# Altium PCB PCB1.PcbDoc
Units mm, origin at the board's own origin, x right, y up, seen from the top; angles counter-clockwise.
Board outline 112.39 x 73.91 mm, 2 copper layers (Top Layer, Bottom Layer); 73 components, 57 nets, 231 pads, 22 vias.
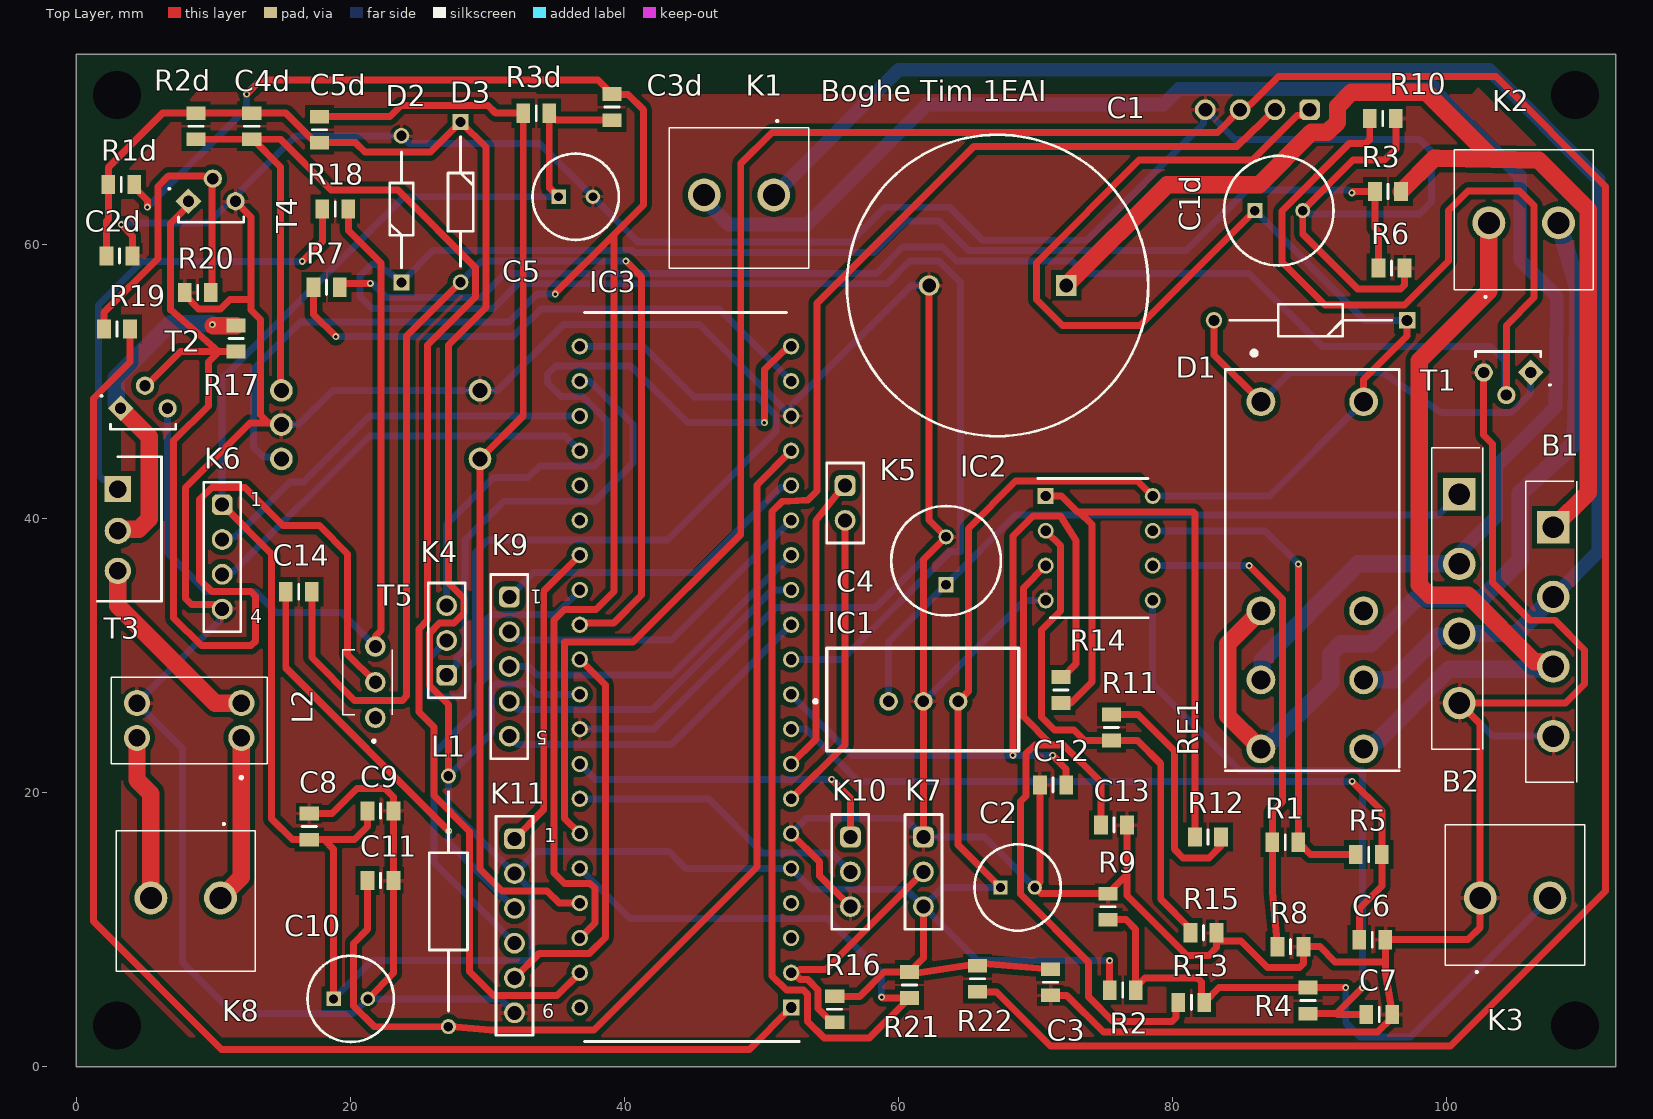
[diagram p0: Top Layer view]
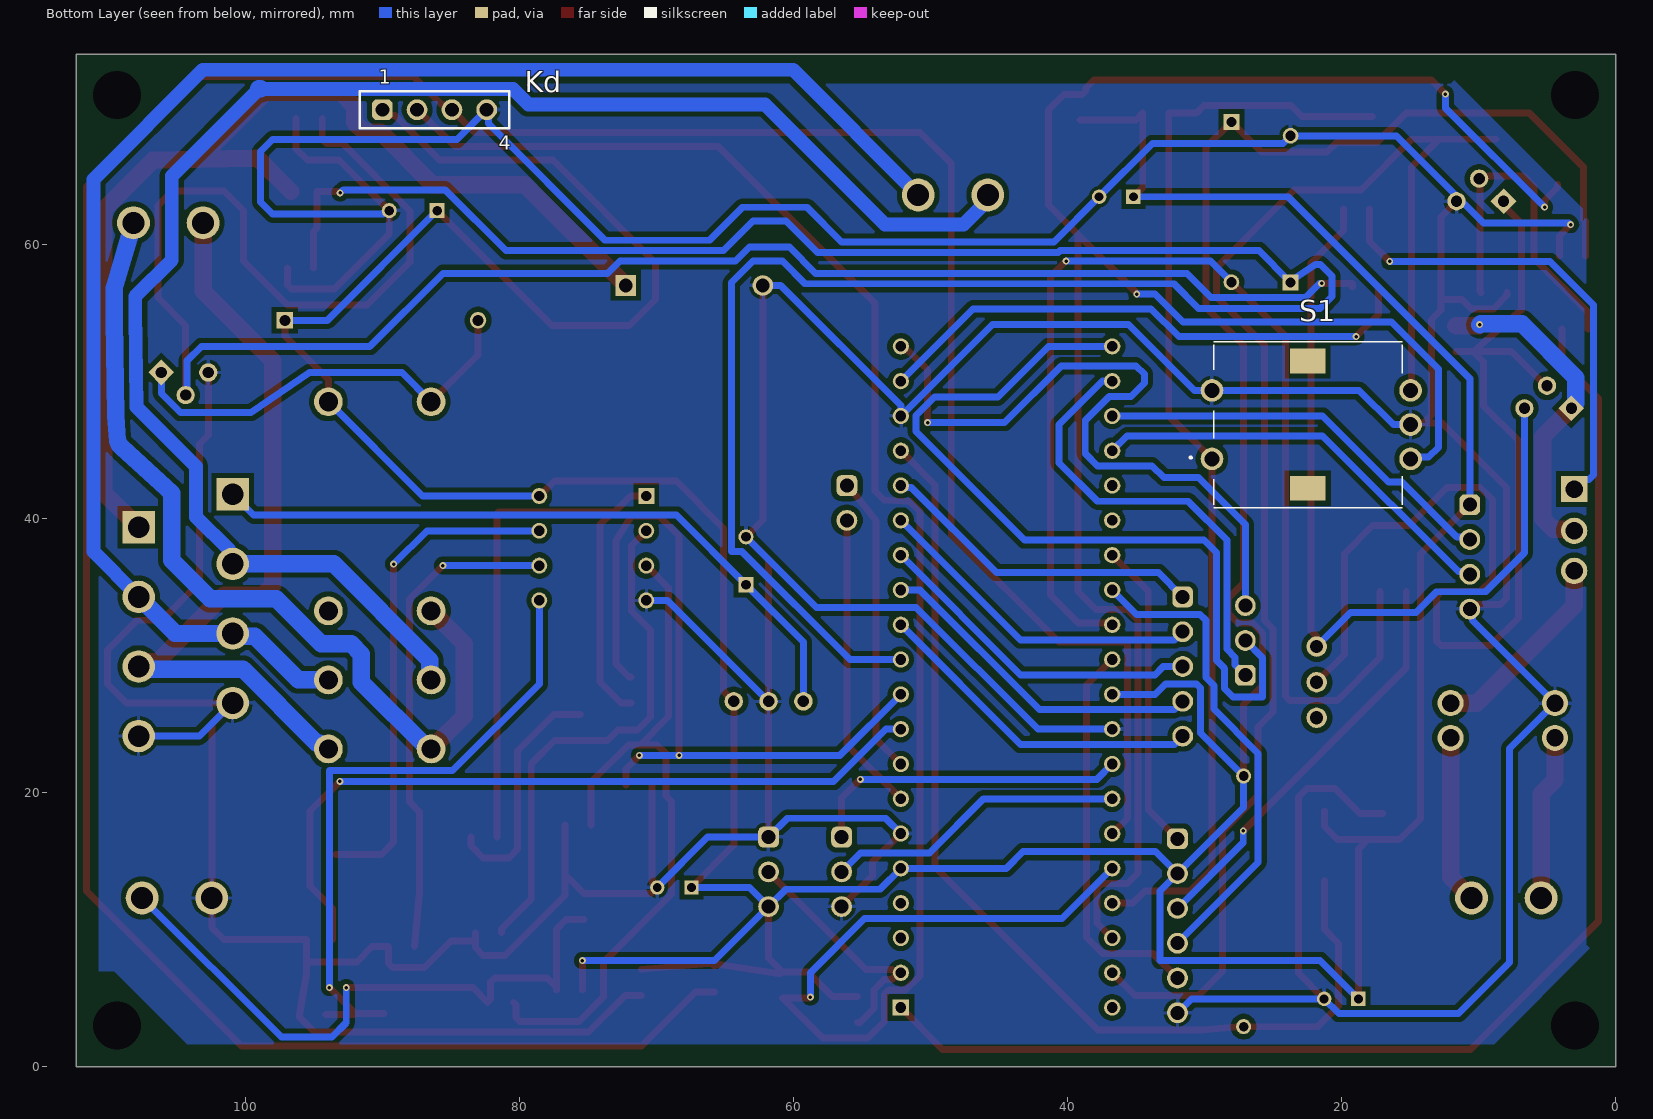
[diagram p1: Bottom Layer view, seen from below]
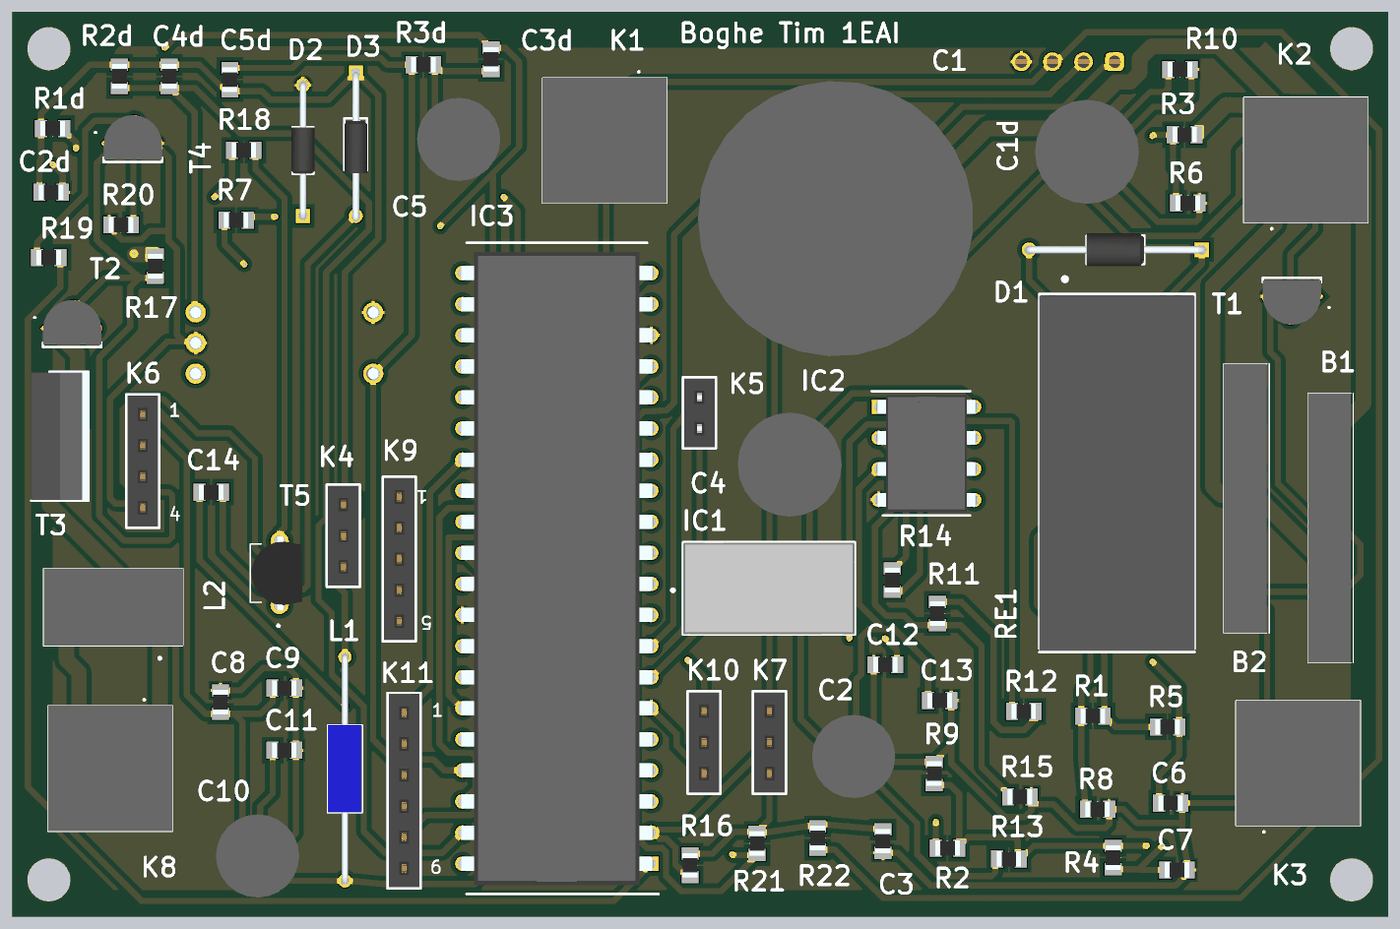
[diagram p2: 3D render of the assembled board from above, using the file's embedded part models]

## Layer stack, top to bottom
Top Solder: solder mask 0.0102, Solder Resist, Dk 3.5
Top Layer: signal copper 0.0356
Dielectric 1: dielectric 0.32, FR-4, Dk 4.8
Bottom Layer: signal copper 0.0356
Bottom Solder: solder mask 0.0102, Solder Resist, Dk 3.5

## Board outline
0,0 112.395,0 112.395,73.914 0,73.914

## Design rules (kind name [scope] priority, off if disabled: settings)
Clearance Clearance_4 [InNamedPolygon('GND_L02_P001')] p1: gap=0.381 ignorepadtopadclearanceinfootprint=FALSE
Clearance Clearance_3 [InNamedPolygon('GND_L01_P000')] p2: gap=0.381 ignorepadtopadclearanceinfootprint=FALSE
Clearance Clearance_2 [InNamedPolygon('GND_L01_P001')] p3: gap=0.508 ignorepadtopadclearanceinfootprint=FALSE
Clearance Clearance_1 [InNamedPolygon('GND_L02_P000')] p4: gap=0.381 ignorepadtopadclearanceinfootprint=FALSE
Clearance [All] p5: gap=0.254 ignorepadtopadclearanceinfootprint=FALSE except(0: Arc-Hole Track-Hole SMDPad-Hole THPad-Hole Via-Hole Fill-Hole Poly-Hole Region-Hole Text-Hole)
HoleSize [All] p1: absolutevalues=TRUE maxlimit=3.556 minlimit=0.254 maxpercent=80.000 minpercent=20.000
PolygonConnect [All] p1: connectstyle=Relief reliefconductorwidth=0.254 reliefentries=4 polygonreliefangle="90 Angle" airgapwidth=0.254
RoutingVias [All] p1: holewidth=0.254 width=0.508 viastyle="Through Hole" minholewidth=0.254 minwidth=0.508 maxholewidth=0.254 maxwidth=0.508
SolderMaskExpansion [All] p1: expansion=0.102 istentingtop=FALSE
Width [All] p1: maxlimit=1.27 minlimit=0.508 preferedwidth=0.508 minimp=50.000000 maximp=50.000000 favimp=50.000000
29 further rules are at their usual default settings.

## Classes and differential pairs
component class Soldeerbout_P5: C1d C2d C3d C4d C5d Kd R1d R2d R3d S1
component class Soldeerbout_P4: C2 C3 C6 C7 C12 C13 IC2 K3 R1 R2 R4 R5 R8 R9 R11 R12 R13 R14 R15
component class Soldeerbout_P3: C8 C9 C10 C11 C14 D3 IC3 K4 K5 K6 K7 K9 K10 K11 L1 R16 R21 R22
component class Soldeerbout_P2: K8 L2 R17 R18 R19 R20 T2 T3 T4 T5
component class Soldeerbout_P1: B1 B2 C1 C4 C5 D1 D2 IC1 K1 K2 R3 R6 R7 R10 RE1 T1

## Components (designator, comment, footprint, x,y, rotation, side; value= is the part's Value field where it differs from the comment)
B1 "GBU6J" "B1,2 GBU6J 600V 6 A" 107.823,39.37 r90 top
B2 "GBU6J" "B1,2 GBU6J 600V 6 A" 100.965,41.783 r90 top
C1 "4700uF" "C 50V 4700UF" 72.263,57.023 r180 top
C1d "100u" CAPPRD350W52D800H1300 86.035,62.484 r0 top
C2 "10u" "C 50V 10µF" 67.477,13.081 r0 top
C2d "100n" 0805 3.175,59.182 r0 top
C3 "100n" 0805 71.12,6.162 r270 top
C3d "10n" 0805 39.116,70.043 r270 top
C4 "100uF" CAPPRD350W52D800H1300 63.5,35.179 r90 top
C4d "10n" 0805 12.827,68.646 r90 top
C5 "10uF" "C 50V 10µF" 35.219,63.5 r0 top
C5d "10n" 0805 17.78,68.392 r270 top
C6 "10n" 0805 94.615,9.271 r0 top
C7 "10n" 0805 95.123,3.81 r0 top
C8 "100n" 0805 17.018,17.526 r90 top
C9 "100n" 0805 22.225,18.669 r0 top
C10 "10uF" "C 50V 10µF" 18.796,4.953 r0 top
C11 "100n" 0805 22.225,13.589 r0 top
C12 "10n" 0805 71.313,20.574 r180 top
C13 "10n" 0805 75.753,17.653 r0 top
C14 "ESR10EZPJ183_1" 0805 16.256,34.671 r180 top
D1 "1N4007" 1N4007 97.155,54.483 r180 top
D2 "1N5231B" "1N5231B 5.1V 0.5W" 23.749,57.245 r90 top
D3 "1N4148" "1N4148, 100V 200MA" 28.067,68.961 r270 top
IC1 "TSR_2-2450" "IC1 TSR-2" 54.809,30.56 r0 top
IC2 "MCP6002-E_P" "IC2 DUAL OPAMP" 74.676,37.846 r0 top
IC3 "ATMEGA4809-PF" IC3 44.482,28.448 r180 top
K1 "" "K PRINTKROONSTEEN 5.08" 50.927,63.627 r180 top
K2 "" "K PRINTKROONSTEEN 5.08" 103.124,61.595 r0 top
K3 "TB007-508-02BE" "K PRINTKROONSTEEN 5.08" 102.489,12.319 r0 top
K4 "61300311821" 61300311821 27.051,31.115 r90 top
K5 "61300211821" 61300211821 56.134,41.148 r270 top
K6 "61300411821" 61300411821 10.668,37.211 r270 top
K7 "61300311821" 61300311821 61.849,14.224 r270 top
K8 "" "K PRINTKROONSTEEN 5.08" 10.541,12.319 r180 top
K9 "61300511821" 61300511821 31.623,29.21 r270 top
K10 "61300311821" 61300311821 56.515,14.224 r270 top
K11 "61300611821" 61300611821 32.004,10.287 r270 top
Kd "61300411821" 61300411821 86.233,69.85 r180 bottom
L1 "10uH 130mA" "L1 10UH 130MA" 27.178,2.921 r90 top
L2 "smoorspoel 10A" "CM SMOORSPOELEN/FILTERS 170OHM 100MHZ 10A" 12.065,24.003 r90 top
R1 "18K" 0805 88.265,16.383 r0 top
R1d "10k" 0805 3.302,64.389 r180 top
R2 "1M" 0805 76.388,5.588 r180 top
R2d "10k" 0805 8.763,68.646 r90 top
R3 "68K" 0805 95.758,63.881 r180 top
R3d "10k" 0805 33.589,69.596 r0 top
R4 "5.6K" 0805 89.916,4.826 r90 top
R5 "5.6K" 0805 94.361,15.494 r0 top
R6 "10K" 0805 96.012,58.293 r0 top
R7 "10K" 0805 18.288,56.896 r180 top
R8 "100e" 0805 88.646,8.763 r0 top
R9 "10M" 0805 75.311,11.684 r90 top
R10 "4.7K" 0805 95.377,69.215 r0 top
R11 "18K" 0805 75.565,24.765 r90 top
R12 "18K" 0805 82.616,16.764 r180 top
R13 "5.6K" 0805 81.407,4.699 r0 top
R14 "5.6K" 0805 71.882,27.498 r90 top
R15 "100e" 0805 82.296,9.779 r0 top
R16 "4.7K" 0805 55.372,4.191 r270 top
R17 "4.7K" 0805 11.684,53.147 r270 top
R18 "100e" 0805 18.923,62.611 r180 top
R19 "10K" 0805 2.987,53.848 r0 top
R20 "4.7K" 0805 8.89,56.515 r180 top
R21 "4.7K" 0805 60.833,5.969 r270 top
R22 "4.7K" 0805 65.786,6.416 r270 top
RE1 "5 VDC 8A" "RELAIS 5V 8A" 90.23,48.534 r270 top
S1 "482016514001" 482016514001 22.486,46.863 r180 bottom
T1 "BC547" "T1,2,4 BC547C 45V 100MA" 105.791,50.546 r180 top
T2 "BC547" "T1,2,4 BC547C 45V 100MA" 3.632,48.184 r0 top
T3 "IRF9Z34NPBF" "T3 P-MOSFET 55V 17A 0.1E" 3.048,41.783 r270 top
T4 "BC547" "T1,2,4 BC547C 45V 100MA" 8.585,63.297 r0 top
T5 "BC557" "BC557C T5 45V 100MA" 21.259,27.167 r90 top

## Footprints (in the part's own frame and the unit in brackets; to place one, negate y for a bottom-side part, rotate by r counter-clockwise, add the part's x,y. Pads: shape width x height; smd on the part's side, far side on the other; paste and mask are expansions set on the pad)
1N4007 [mm]
  rect 1.2x1.2 hole 0.8: 1(0,0)
  round 1.2 hole 0.8: 2(14.1,0)
  silkscreen extent 1.14,-1.18 12.95,1.18, body extent -0.3,-1.35 14.4,1.35, height 2.69
"1N4148, 100V 200MA" [mm]
  rect 1.15x1.15 hole 0.75: 1(0,0)
  round 1.15 hole 0.75: 2(11.7,0)
  silkscreen extent 1.08,-0.93 10.54,0.93, body extent -0.02,-0.92 12.18,0.92, height 1.84
"1N5231B 5.1V 0.5W" [mm]
  rect 1.15x1.15 hole 0.75: 1(0,0)
  round 1.15 hole 0.75: 2(10.7,0)
  silkscreen extent 1.08,-0.86 9.52,0.86, body extent -0.26,-0.95 10.95,0.95, height 1.9
0805 [mm]
  rect 1x1.4 smd: 1(-0.95,0) 2(0.95,0)
  silkscreen extent 0,-0.53 0,0.53, body extent -1,-0.63 1,0.63, height 0.65
61300211821 [mm] "Socket Header, Pitch 2.54 mm, THT, Vertical, single row, 2p"
  rrect50% 1.52x1.52 hole 1.02: 1(-1.27,0)
  round 1.52 hole 1.02: 2(1.27,0)
  silkscreen extent -2.92,-1.35 2.92,1.35, body extent -2.79,-1.25 2.79,1.25, height 8.55
61300311821 [mm] "Socket Header, Pitch 2.54 mm, THT, Vertical, single row, 3p"
  rrect50% 1.52x1.52 hole 1.02: 1(-2.54,0)
  round 1.52 hole 1.02: 2(0,0) 3(2.54,0)
  silkscreen extent -4.19,-1.35 4.19,1.35, body extent -4.06,-1.25 4.06,1.25, height 8.55
61300411821 [mm] "Socket Header, Pitch 2.54 mm, THT, Vertical, single row, 4p"
  rrect50% 1.52x1.52 hole 1.02: 1(-3.81,0)
  round 1.52 hole 1.02: 2(-1.27,0) 3(1.27,0) 4(3.81,0)
  silkscreen extent -5.46,-1.35 5.46,1.35, body extent -5.33,-1.25 5.33,1.25, height 8.55
61300511821 [mm] "Socket Header, Pitch 2.54 mm, THT, Vertical, single row, 5p"
  rrect50% 1.52x1.52 hole 1.02: 1(-5.08,0)
  round 1.52 hole 1.02: 2(-2.54,0) 3(0,0) 4(2.54,0) 5(5.08,0)
  silkscreen extent -6.73,-1.35 6.73,1.35, body extent -6.6,-1.25 6.6,1.25, height 8.55
61300611821 [mm] "Socket Header, Pitch 2.54 mm, THT, Vertical, single row, 6p"
  rrect50% 1.52x1.52 hole 1.02: 1(-6.35,0)
  round 1.52 hole 1.02: 2(-3.81,0) 3(-1.27,0) 4(1.27,0) 5(3.81,0) 6(6.35,0)
  silkscreen extent -8,-1.35 8,1.35, body extent -7.87,-1.25 7.87,1.25, height 8.55
482016514001 [mm]
  round 1.65 hole 1.1: 1(-7,-2.5) 2(-7,2.5) 3(7.5,-2.5) 4(7.5,0) 5(7.5,2.5)
  rect 2.6x1.8 smd: MP1(0,-4.65) MP2(0,4.65)
  silkscreen extent -8.6,-6.05 6.88,6.05, body extent -7.45,-5.85 7.95,5.85, height 27
"B1,2 GBU6J 600V 6 A" [mm]
  rect 2.37x2.37 hole 1.58: 1(0,0)
  round 2.37 hole 1.58: 2(-5.08,0) 3(-10.16,0) 4(-15.24,0)
  silkscreen extent -18.62,-1.7 3.38,2, body extent -18.62,-1.5 3.38,2, height 18.9
"BC557C T5 45V 100MA" [mm]
  round 1.493 hole 0.96: 1(-1.7,-0.585) 2(0.9,-0.585) 3(3.5,-0.585)
  silkscreen extent -3.5,-1.81 3.28,1.81, body extent -2.2,-2.42 3.96,1.71, height 8.67
"C 50V 10µF" [mm]
  rect 1.05x1.05 hole 0.65: 1(0,0)
  round 1.05 hole 0.65: 2(2.5,0)
  silkscreen extent -1.9,-3.15 4.4,3.15, body extent -2.15,-3.4 4.65,3.4, height 8.5
"C 50V 4700UF" [mm]
  rect 1.5x1.5 hole 1: 1(0,0)
  round 1.5 hole 1: 2(10,0)
  silkscreen extent -6,-11 16,11, body extent -6.25,-11.25 16.25,11.25, height 37
CAPPRD350W52D800H1300 [mm]
  rect 1.1x1.1 hole 0.7: 1(0,0)
  round 1.1 hole 0.7: 2(3.5,0)
  silkscreen extent -2.25,-4 5.75,4, body extent -2.5,-4.25 6,4.25, height 13
"CM SMOORSPOELEN/FILTERS 170OHM 100MHZ 10A" [mm]
  round 1.905 hole 1.27: 1(0,0) 2(2.54,0) 3(2.54,7.62) 4(0,7.62)
  silkscreen extent -3,-1.88 4.42,9.5, body extent -1.88,-1.88 4.42,9.5, height 9.6
"IC1 TSR-2" [mm]
  round 1.35 hole 0.85: 1(4.5,-3.89) 2(7.04,-3.89) 3(9.58,-3.89)
  silkscreen extent -0.95,-7.5 14,0, body extent 0.01,-7.5 14.01,0, height 10.33
"IC2 DUAL OPAMP" [mm]
  rect 1.158x1.158 hole 0.758: 1(-3.905,3.81)
  round 1.158 hole 0.758: 2(-3.905,1.27) 3(-3.905,-1.27) 4(-3.905,-3.81) 5(3.905,-3.81) 6(3.905,-1.27) 7(3.905,1.27) 8(3.905,3.81)
  silkscreen extent -4.48,-5.08 3.56,5.08, body extent -4.04,-4.75 4.04,4.75, height 5.33
IC3 [mm]
  rect 1.184x1.184 hole 0.784: 1(-7.715,24.13)
  round 1.184 hole 0.784: 2(-7.715,21.59) 3(-7.715,19.05) 4(-7.715,16.51) 5(-7.715,13.97) 6(-7.715,11.43) 7(-7.715,8.89) 8(-7.715,6.35) 9(-7.715,3.81) 10(-7.715,1.27) 11(-7.715,-1.27) 12(-7.715,-3.81) 13(-7.715,-6.35) 14(-7.715,-8.89) 15(-7.715,-11.43) 16(-7.715,-13.97) 17(-7.715,-16.51) 18(-7.715,-19.05) 19(-7.715,-21.59) 20(-7.715,-24.13) 21(7.715,-24.13) 22(7.715,-21.59) 23(7.715,-19.05) 24(7.715,-16.51) 25(7.715,-13.97) 26(7.715,-11.43) 27(7.715,-8.89) 28(7.715,-6.35) 29(7.715,-3.81) 30(7.715,-1.27) 31(7.715,1.27) 32(7.715,3.81) 33(7.715,6.35) 34(7.715,8.89) 35(7.715,11.43) 36(7.715,13.97) 37(7.715,16.51) 38(7.715,19.05) 39(7.715,21.59) 40(7.715,24.13)
  silkscreen extent -8.31,-26.61 7.37,26.61, body extent -7.86,-25.88 7.86,25.88, height 6.35
"K PRINTKROONSTEEN 5.08" [mm]
  round 2.4 hole 1.6: 1(0,0) 2(5.08,0)
  silkscreen extent -2.54,-5.45 7.62,5.35, body extent -2.54,-4.9 7.62,5.35, height 14.1
"L1 10UH 130MA" [mm]
  round 1.1 hole 0.7: 1(0,0) 2(18.3,0)
  silkscreen extent 1.15,-1.4 17.15,1.4, body extent -0.25,-1.39 18.52,1.39, height 2.78
"RELAIS 5V 8A" [mm]
  round 2.1 hole 1.4: 1(0,-3.75) 2(15.26,-3.75) 3(20.3,-3.75) 4(25.34,-3.75) 5(25.34,3.75) 6(20.3,3.75) 7(15.26,3.75) 8(0,3.75)
  silkscreen extent -3.67,-6.35 26.93,6.35, body extent -2.21,-6.35 26.79,6.35, height 15.86
"T1,2,4 BC547C 45V 100MA" [mil]
  rect 52.48x52.48 hole 32.28 rot 45: 1(-15,-5)
  round 52.48 hole 32.28: 2(55,60) 3(120,-5)
  silkscreen extent -72,-65 144,32, body extent -44,-56 144,86, height 214
"T3 P-MOSFET 55V 17A 0.1E" [mm] "IRF9Z34NPBF"
  rect 1.92x1.92 hole 1.28: 1(-0.381,0)
  round 1.92 hole 1.28: 2(2.667,0) 3(5.588,0)
  silkscreen extent -2.73,-1.5 7.81,3.19, body extent -2.67,-1.5 7.75,3.19, height 18.84

## Part data
B1 B2: "Bridge Rectifier", Manufacturer_Name="GeneSiC Semiconductor", Datasheet Link=https://www.diodemodule.com/silicon_products/bridge_rectifiers/gbu6j.pdf, Height=18.8mm, Manufacturer_Part_Number=GBU6J
C1: library part ESK478M050AQ3AA, "Capacitor Polarised", Manufacturer_Name=Kemet, Mouser2 Part Number=80-ESK478M050AQ3AA, Datasheet Link=https://componentsearchengine.com//ESK478M050AQ3AA.pdf, Height=37mm, Manufacturer_Part_Number=ESK478M050AQ3AA, Mouser2 Price/Stock=https://www.mouser.com/Search/Refine.aspx?Keyword=80-ESK478M050AQ3AA
C1d C4: library part 860020674015, "Capacitor", Manufacturer_Name="Wurth Elektronik", Datasheet Link=https://www.we-online.com/catalog/datasheet/860020674015.pdf, Height=13mm, Manufacturer_Part_Number=860020674015
C2 C5 C10: library part ESS106M050AE2AA, "Capacitor Polarised", Manufacturer_Name=Kemet, Datasheet Link=https://content.kemet.com/datasheets/KEM_A4057_ESS.pdf, Height=8.5mm, Manufacturer_Part_Number=ESS106M050AE2AA
C2d C3 C3d C4d C5d C6 C7 C8 C9 C11 C12 C13: library part ESR10EZPJ183_1, "Resistor", Manufacturer_Name="ROHM Semiconductor", Manufacturer_Part_Number=ESR10EZPJ183, Datasheet Link=https://datasheet.datasheetarchive.com/originals/distributors/Datasheets_SAMA/30ccb516c688c96e56c83a00b77a93f4.pdf, Height=0.65mm
C14: "Resistor", Manufacturer_Name="ROHM Semiconductor", Manufacturer_Part_Number=ESR10EZPJ183, Datasheet Link=https://datasheet.datasheetarchive.com/originals/distributors/Datasheets_SAMA/30ccb516c688c96e56c83a00b77a93f4.pdf, Height=0.65mm
D1: library part RL1N4007-T, "Diode", Manufacturer_Name=Rectron, Datasheet Link=https://www.mouser.in/datasheet/2/345/rl1n4001-rl1n4007-35989.pdf, Manufacturer_Part_Number=RL1N4007-T
D2: "Zener Diode", Manufacturer_Name="ON Semiconductor", Manufacturer_Part_Number=1N5231B
D3: "Diode", Manufacturer_Name=Nexperia, Datasheet Link=https://datasheet.datasheetarchive.com/originals/distributors/Datasheets-112/DSAP0040891.pdf, Manufacturer_Part_Number=1N4148
IC1: "Power Supply", Manufacturer_Name="Traco Power", Manufacturer_Part_Number="TSR 2-2450", Mouser2 Part Number=495-TSR2-2450, Datasheet Link="https://componentsearchengine.com//TSR 2-2450.pdf", Mouser2 Price/Stock=https://www.mouser.com/Search/Refine.aspx?Keyword=495-TSR2-2450
IC2: "Integrated Circuit", Manufacturer_Name=Microchip, Manufacturer_Part_Number=MCP6002-E/P, Mouser2 Part Number=579-MCP6002-E/P, Datasheet Link=https://componentsearchengine.com//MCP6002-E_P.pdf, Height=5.334mm, Mouser2 Price/Stock=https://www.mouser.com/Search/Refine.aspx?Keyword=579-MCP6002-E%2FP
IC3: "Integrated Circuit", Manufacturer_Name=Microchip, Mouser2 Part Number=556-ATMEGA4809-PF, Datasheet Link=https://componentsearchengine.com//ATMEGA4809-PF.pdf, Height=6.35mm, Manufacturer_Part_Number=ATMEGA4809-PF, Mouser2 Price/Stock=https://www.mouser.com/Search/Refine.aspx?Keyword=556-ATMEGA4809-PF
K1 K2 K8: library part TB007-508-02BE, "Connector", Manufacturer_Name="CUI Inc.", Mouser2 Part Number=490-TB007-508-02BE, Datasheet Link=https://componentsearchengine.com//TB007-508-02BE.pdf, Height=14mm, Manufacturer_Part_Number=TB007-508-02BE, Mouser2 Price/Stock=https://www.mouser.com/Search/Refine.aspx?Keyword=490-TB007-508-02BE
K3: "Connector", Manufacturer_Name="CUI Inc.", Mouser2 Part Number=490-TB007-508-02BE, Datasheet Link=https://componentsearchengine.com//TB007-508-02BE.pdf, Height=14mm, Manufacturer_Part_Number=TB007-508-02BE, Mouser2 Price/Stock=https://www.mouser.com/Search/Refine.aspx?Keyword=490-TB007-508-02BE
K4 K7 K10: "WR-PHD Socket Header, THT, pitch 2.54mm, Single Row, Vertical, 3p", Contact Resistance=20mOhm, Manufacturer="Wurth Elektronik", Operating Temperature="-40 to +125degC", Rated Current=3A, Withstanding Voltage=500VAC, Working Voltage=250VAC, ComponentLink1Description=Manufacturer, ComponentLink1URL=http://www.we-online.de, ComponentLink2Description=Datasheet, ComponentLink2URL=https://www.we-online.com/catalog/datasheet/61300311821.pdf, Gender="Socket Header", Manufacturer Part Number=61300311821, Mounting Technology=THT, Orientation=Vertical, Packaging=Tray, Pin Number=3, Pitch=2.54mm, Row Number=Single
K5: "WR-PHD Socket Header, THT, pitch 2.54mm, Single Row, Vertical, 2p", Contact Resistance=20mOhm, Manufacturer="Wurth Elektronik", Operating Temperature="-40 to +125degC", Rated Current=3A, Withstanding Voltage=500VAC, Working Voltage=250VAC, ComponentLink1Description=Manufacturer, ComponentLink1URL=http://www.we-online.de, ComponentLink2Description=Datasheet, ComponentLink2URL=https://www.we-online.com/catalog/datasheet/61300211821.pdf, Gender="Socket Header", Manufacturer Part Number=61300211821, Mounting Technology=THT, Orientation=Vertical, Packaging=Tray, Pin Number=2, Pitch=2.54mm, Row Number=Single
K6 Kd: "WR-PHD Socket Header, THT, pitch 2.54mm, Single Row, Vertical, 4p", Contact Resistance=20mOhm, Manufacturer="Wurth Elektronik", Operating Temperature="-40 to +125degC", Rated Current=3A, Withstanding Voltage=500VAC, Working Voltage=250VAC, ComponentLink1Description=Manufacturer, ComponentLink1URL=http://www.we-online.de, ComponentLink2Description=Datasheet, ComponentLink2URL=https://www.we-online.com/catalog/datasheet/61300411821.pdf, Gender="Socket Header", Manufacturer Part Number=61300411821, Mounting Technology=THT, Orientation=Vertical, Packaging=Tray, Pin Number=4, Pitch=2.54mm, Row Number=Single
K9: "WR-PHD Socket Header, THT, pitch 2.54mm, Single Row, Vertical, 5p", Contact Resistance=20mOhm, Manufacturer="Wurth Elektronik", Operating Temperature="-40 to +125degC", Rated Current=3A, Withstanding Voltage=500VAC, Working Voltage=250VAC, ComponentLink1Description=Manufacturer, ComponentLink1URL=http://www.we-online.de, ComponentLink2Description=Datasheet, ComponentLink2URL=https://www.we-online.com/catalog/datasheet/61300511821.pdf, Gender="Socket Header", Manufacturer Part Number=61300511821, Mounting Technology=THT, Orientation=Vertical, Packaging=Tray, Pin Number=5, Pitch=2.54mm, Row Number=Single
K11: "WR-PHD Socket Header, THT, pitch 2.54mm, Single Row, Vertical, 6p", Contact Resistance=20mOhm, Manufacturer="Wurth Elektronik", Operating Temperature="-40 to +125degC", Rated Current=3A, Withstanding Voltage=500VAC, Working Voltage=250VAC, ComponentLink1Description=Manufacturer, ComponentLink1URL=http://www.we-online.de, ComponentLink2Description=Datasheet, ComponentLink2URL=https://www.we-online.com/catalog/datasheet/61300611821.pdf, Gender="Socket Header", Manufacturer Part Number=61300611821, Mounting Technology=THT, Orientation=Vertical, Packaging=Tray, Pin Number=6, Pitch=2.54mm, Row Number=Single
L1: library part 78F100J-RC, "Inductor", Manufacturer_Name=Bourns, Mouser2 Part Number=542-78F100-RC, Datasheet Link=https://componentsearchengine.com//78F100J-RC.pdf, Manufacturer_Part_Number=78F100J-RC, Mouser2 Price/Stock=https://www.mouser.com/Search/Refine.aspx?Keyword=542-78F100-RC
L2: library part CM2545X171B-10, "Transformer", Manufacturer_Name="Laird Technologies", Datasheet Link=https://datasheet.datasheetarchive.com/originals/dk/DKDS-7/122753.pdf, Height=9.5mm, Manufacturer_Part_Number=CM2545X171B-10
R1 R1d R2 R2d R3 R3d R4 R5 R6 R7 R8 R9 R10 R11 R12 R13 R14 R15 R16 R17 R18 R19 R20 R21 R22: library part ESR10EZPJ183, "Resistor", Manufacturer_Name="ROHM Semiconductor", Datasheet Link=https://datasheet.datasheetarchive.com/originals/distributors/Datasheets_SAMA/30ccb516c688c96e56c83a00b77a93f4.pdf, Height=0.65mm, Manufacturer_Part_Number=ESR10EZPJ183
RE1: library part RT424005, "Relay or Contactor", Manufacturer_Name="TE Connectivity", Mouser2 Part Number=655-RT424005, Datasheet Link=https://componentsearchengine.com//RT424005.pdf, Manufacturer_Part_Number=RT424005, Mouser2 Price/Stock=https://www.mouser.com/Search/Refine.aspx?Keyword=655-RT424005
S1: "Switch", Manufacturer_Name="Wurth Elektronik", Mouser2 Part Number=710-482016514001, Datasheet Link=https://componentsearchengine.com//482016514001.pdf, Height=26.9mm, Manufacturer_Part_Number=482016514001, Mouser2 Price/Stock=https://www.mouser.com/Search/Refine.aspx?Keyword=710-482016514001
T1 T2 T4: library part BC547CBU, "Transistor BJT NPN", Manufacturer_Name="ON Semiconductor", Datasheet Link=https://www.onsemi.com/pdf/datasheet/bc550-d.pdf, Height=5.33mm, Manufacturer_Part_Number=BC547CBU
T3: "MOSFET (P-Channel)", Manufacturer_Name=Infineon, Mouser2 Part Number=942-IRF9Z34NPBF, Datasheet Link=https://componentsearchengine.com//IRF9Z34NPBF.pdf, Height=4.69mm, Manufacturer_Part_Number=IRF9Z34NPBF, Mouser2 Price/Stock=https://www.mouser.com/Search/Refine.aspx?Keyword=942-IRF9Z34NPBF
T5: library part BC557ATA, "Transistor BJT PNP", Manufacturer_Name="ON Semiconductor", Mouser2 Part Number=512-BC557ATA, Datasheet Link=https://componentsearchengine.com//BC557ATA.pdf, Manufacturer_Part_Number=BC557ATA, Mouser2 Price/Stock=https://www.mouser.com/Search/Refine.aspx?Keyword=512-BC557ATA

## Free pads (board coordinates)
  round 1.524 hole 3.5: 1(3,3) 2(3,70.914) 4(109.395,3)
  round 0 hole 3.5: 3(109.395,70.914)

## Via types
v1: diameter 0.508, hole 0.254, Top Layer to Bottom Layer, 22 vias

## Nets (pads, with @x,y where several pads share a name; then routed paths per layer and width w, separated by ;. In a path a pad name is that pad's centre, name@x,y a point inside that pad or via, vN(x,y) a via of type N, cw(c..) or ccw(c..) an arc to the next point about the centre after c; other vN are vias at no path point)
+5: C1d.1 C2.1 C2d.1 C3.1 C3d.2 C4d.2 C5.1 C5d.2 C8.1 C9.1 C10.1 D1.1 D3.1 IC1.3 IC2.8 IC3.5 IC3.31 K6.1 K7.3 K11.2 Kd.1 L1.2 R1d.2 R2.2 R2d.2 R3d.2 R16.1 R21.1 R22.1 RE1.8 | length 438.6
  Top Layer w0.508: C2d.1 2.225,61.722 2.352,61.849 R1d.2 2.352,65.623 6.325,69.596 R2d.2 C4d.2 15.316,69.596 17.47,67.442 C5d.2 20.396,67.442 21.087,66.751 25.857,66.751 D3.1 29.912,67.116 29.912,55.416 27.178,52.682 27.178,35.321 28.319,34.18 28.319,33.13 27.574,32.385 26.528,32.385 25.783,31.64 25.783,27.827 27.178,26.432 L1.2 ; K6.1 14.275,37.414 14.275,18.1 15.799,16.576 C8.1 18.095,16.576 ; C10.1 18.796,15.875 18.095,16.576 ; C9.1 21.275,17.526 20.325,16.576 18.095,16.576 ; C5.1 34.539,64.18 R3d.2 35.042,69.093 C3d.2 ; R16.1 57.201,5.141 58.979,6.919 R21.1 ; K7.3 61.849,7.935 R21.1 ; C2.1 64.389,16.169 IC1.3 65.126,27.407 65.126,39.294 68.58,42.748 77.488,42.748 IC2.8 ; C3.1 70.674,7.152 70.665,7.152 66.2,7.54 65.993,7.54 65.851,7.421 R22.1 65.652,7.465 65.446,7.465 61.179,6.815 60.974,6.815 60.84,6.914 R21.1 ; R2.2 v1(75.438,7.747) ; C1d.1 77.653,54.102 72.009,54.102 70.104,56.007 70.104,58.674 77.597,66.167 85.852,66.167 89.109,69.424 89.617,69.424 Kd.1 ; RE1.8 93.98,50.165 97.155,53.34 D1.1
  Bottom Layer w0.508: K6.1 10.668,50.241 23.927,63.5 C5.1 ; C10.1 21.59,7.747 33.274,7.747 33.274,12.827 K11.2 ; IC3.31 33.653,27.178 32.893,27.938 30.63,27.938 30.328,27.635 30.328,24.371 L1.2 27.178,18.923 K11.2 ; C2.1 63.246,13.081 K7.3 ; v1(75.438,7.747) 65.786,7.747 K7.3 ; IC2.8 87.102,41.656 RE1.8 ; C1d.1 94.036,54.483 D1.1 ; K11.2 33.604,15.697 43.282,15.697 44.501,14.478 IC3.5 53.721,12.954 60.579,12.954 K7.3
GND: B1.4 B2.4 C1.2 C1d.2 C2.2 C2d.2 C3.2 C4.2 C5.2 C6.2 C7.2 C8.2 C9.2 C10.2 C11.2 C12.2 C13.2 D2.2 IC1.2 IC2.4 IC3.6 IC3.18 IC3.32 K3.1 K6.4 K7.1 K10.3 K11.6 Kd.4 L2.3 R6.2 R8.2 R9.2 R10.2 R15.2 R20.2 S1.2 S1.4 T1.3 T4.3 | length 587.3
  Top Layer w0.508: v1(3.302,61.468) 4.125,60.645 C2d.2 ; R20.2 7.94,56.315 8.948,55.307 10.55,55.307 11.25,56.007 12.77,56.007 ; K6.4 10.327,33.742 8.426,33.742 8.001,34.167 8.001,42.291 12.7,46.99 14.034,46.99 ; T4.3 12.77,62.033 12.77,56.007 ; S1.4@14.986,46.99 14.034,46.99 ; C8.2 18.669,18.476 20.513,20.32 22.54,20.32 23.175,19.685 C9.2 C11.2 23.175,6.832 C10.2 ; IC3.6 54.28,14.935 54.28,13.919 K10.3 ; K7.1 IC1.2 61.849,37.028 C4.2 62.263,39.916 C1.2 ; C12.2 70.363,13.467 C2.2 70.424,12.634 R9.2 76.703,14.026 ; C3.2 72.309,5.212 74.981,2.54 95.003,2.54 96.073,3.61 C7.2 95.565,6.782 95.565,7.645 ; C13.2 76.703,14.026 ; R15.2 R15.2@83.246,9.169 ; R10.2 96.327,66.99 95.504,66.167 93.218,66.167 C1d.2 89.535,60.782 93.548,56.769 96.664,56.769 96.962,57.067 R6.2 ; T1.3 102.743,46.101 103.378,45.466 103.378,35.331 106.121,32.588 107.95,32.588 110.109,30.429 110.109,27.94 108.712,26.543 B2.4 102.489,25.019 K3.1 102.489,10.16 101.6,9.271 C6.2 95.565,7.645 ; 12.77,56.007 12.77,55.24 13.462,54.548 13.462,47.561 14.034,46.99 ; 76.703,14.026 76.703,12.502 81.077,8.128 82.677,8.128 83.246,8.697 R15.2@83.246,9.169 ; R15.2@83.246,9.169 85.039,9.169 86.97,7.239 89.298,7.239 89.596,7.537 R8.2 90.78,8.763 91.897,7.645 95.565,7.645
  Bottom Layer w0.508: v1(3.302,61.468) 3.429,61.595 9.677,61.595 16.027,67.945 D2.2 24.308,67.386 33.833,67.386 C5.2 41.021,60.198 56.515,60.198 59.05,62.733 63.759,62.733 66.167,60.325 73.787,60.325 82.299,68.837 82.299,69.726 Kd.4 84.582,67.691 98.044,67.691 98.933,66.802 98.933,63.119 98.044,62.23 89.949,62.23 89.695,62.484 C1d.2 ; K6.4 10.474,33.207 10.474,32.572 L2.3 7.772,23.216 7.772,7.62 11.506,3.886 20.229,3.886 C10.2 30.988,4.953 K11.6 ; S1.4 16.249,46.863 18.749,49.363 30.749,49.363 35.564,54.178 45.517,54.178 IC3.18 52.197,48.26 60.96,57.023 C1.2 ; IC3.32 42.189,24.638 51.079,33.528 58.349,33.528 C4.2 ; IC3.6 53.315,18.136 60.477,18.136 K7.1 66.294,16.764 C2.2 ; IC1.2 69.215,34.036 IC2.4 ; B2.4 103.378,24.13 B1.4
NetB1_2: B1.2 B2.3 K1.1 RE1.6 | length 115.5
  Bottom Layer w1.016: K1.1 60.071,72.771 103.124,72.771 111.125,64.77 111.125,37.592 B1.2
  Bottom Layer w1.27: RE1.6 96.179,28.234 99.358,31.413 100.755,31.413 B2.3 105.156,31.623 B1.2
NetB1_3: B1.3 K2.1 RE1.5 | length 57.1
  Top Layer w0.508: B1.3@107.467,29.566 B1.3
  Top Layer w1.27: K2.1 103.124,56.6 98.044,51.52 98.044,35.161 98.788,34.417 101.6,34.417 106.451,29.566 B1.3@107.467,29.566
  Bottom Layer w1.27: RE1.5 94.205,23.194 94.62,23.609 94.816,23.609 100.206,29 107.613,29 B1.3
NetB2_1: B2.1 C4.1 IC1.1 | length 50.4
  Bottom Layer w0.508: IC1.1 59.309,30.988 C4.1 68.58,40.259 99.441,40.259 B2.1
NetB2_2: B2.2 K1.2 RE1.3 | length 118.5
  Bottom Layer w0.508: K1.2@45.847,63.246 K1.2 ; RE1.3 RE1.3@86.578,28.332
  Bottom Layer w1.016: K1.2@45.847,63.246 47.625,61.468 53.34,61.468 62.103,70.231 79.375,70.231 80.518,71.374 98.935,71.374 ; 99.06,71.374 105.41,65.024 105.41,58.871 108.077,56.204 108.077,55.152 107.971,48.154 103.632,43.815 103.632,40.132 101.175,37.675 B2.2@101.175,36.913
  Bottom Layer w1.27: RE1.3@86.578,28.332 86.578,29.682 93.599,36.703 B2.2 B2.2@101.175,36.913 ; 98.935,71.374 99.06,71.374
NetC3d_1: C3d.1 IC3.38 R1d.1 S1.3 | length 149.4
  Top Layer w0.508: R1d.1 4.252,64.189 5.207,63.234 v1(5.207,62.738) ; v1(12.456,70.993) 13.472,72.009 38.1,72.009 38.67,71.439 38.67,71.239 38.937,70.972 40.28,70.972 41.402,69.85 41.402,62.89 39.268,60.757 ; v1(34.976,56.388) 34.976,56.464 39.268,60.757 ; IC3.38 37.867,10.498 37.867,13.03 37.519,13.378 35.662,13.378 34.9,14.14 34.9,32.614 35.662,33.376 37.948,33.376 39.268,34.696 39.268,60.757
  Bottom Layer w0.508: v1(5.207,62.738) 12.456,69.987 v1(12.456,70.993) ; S1.3@14.986,44.49 13.676,44.49 12.954,45.212 12.954,50.927 16.383,54.356 31.598,54.356 33.63,56.388 v1(34.976,56.388)
NetC4d_1: C4d.1 IC3.39 R2d.1 S1.5 | length 107.4
  Top Layer w0.508: R2d.1 C4d.1 C4d.1@12.903,67.696 ; S1.5@14.917,49.432 14.917,65.682 C4d.1@12.903,67.696 ; IC3.39 35.116,5.207 30.48,5.207 28.724,6.963 28.724,17.174 26.111,19.787 26.111,24.79 25.021,25.881 25.021,31.956 25.654,32.589 25.654,52.682 29.15,56.178 29.15,58.318 23.486,63.983 18.623,63.983 14.91,67.696 C4d.1@12.903,67.696
NetC5d_1: C5d.1 IC3.37 R3d.1 S1.1 | length 80.2
  Top Layer w0.508: C5d.1 22.911,69.342 23.724,70.155 30.074,70.155 30.632,69.596 R3d.1 32.639,47.516 S1.1 29.486,14.431 31.09,12.827 34.377,12.827 35.266,11.938 IC3.37
NetC6_1: C6.1 IC3.9 R5.2 | length 55.7
  Top Layer w0.508: v1(93.142,20.828) 95.311,18.659 R5.2 95.311,13.203 93.665,11.557 C6.1
  Bottom Layer w0.508: IC3.9 53.289,24.638 57.099,20.828 v1(93.142,20.828)
NetC7_1: C7.1 IC2.5 R4.1 | length 46.8
  Top Layer w0.508: R4.1 91.999,3.876 ; v1(93.904,5.781) 91.999,3.876 ; C7.1 92.065,3.81 91.999,3.876
  Bottom Layer w0.508: IC2.5 78.581,27.947 84.912,21.615 93.904,21.615 v1(93.904,5.781)
NetC11_1: C11.1 IC3.17 L1.1 | length 76
  Top Layer w0.508: C11.1 21.275,10.033 20.244,9.002 20.244,4.445 21.771,2.917 27.174,2.917 L1.1 27.366,2.945 cw(c27.317,2.44) 27.368,2.945 30.204,2.667 37.795,2.667 49.708,14.58 49.708,42.469 IC3.17
NetC12_1: C12.1 IC3.10 R14.2 | length 56.2
  Top Layer w0.508: v1(68.377,22.733) 68.377,38.735 69.85,40.208 71.858,40.208 73.001,38.405 73.001,29.414 72.034,28.448 R14.2 ; v1(71.272,22.733) 72.263,21.742 C12.1
  Bottom Layer w0.508: IC3.10 56.642,22.733 v1(68.377,22.733) v1(71.272,22.733)
NetC13_1: C13.1 IC2.3 R13.1 | length 53
  Top Layer w0.508: IC2.3 69.139,34.944 69.139,25.568 71.212,23.495 ; C13.1 74.803,20.778 72.085,23.495 71.212,23.495 ; R13.1 80.294,4.537 80.294,3.6 79.997,3.302 75.692,3.302 73.914,5.08 73.914,7.62 68.936,12.598 68.936,19.355 69.342,19.761 69.342,22.86 69.977,23.495 71.212,23.495
NetC14_1: C14.1 D3.2 IC3.29 | length 88
  Top Layer w0.508: C14.1 17.206,29.86 20.32,26.746 23.832,26.746 24.13,27.044 24.13,53.324 D3.2 ; IC3.29 36.896,32.387 39.245,32.387 41.275,34.417 41.275,57.658 v1(40.132,58.801)
  Bottom Layer w0.508: D3.2 29.607,58.801 v1(40.132,58.801)
NetC14_2: C14.2 K11.3 | length 30
  Top Layer w0.508: C14.2 15.306,29.119 v1(27.203,17.221)
  Bottom Layer w0.508: v1(27.203,17.221) 27.203,16.358 K11.3
NetD1_2: D1.2 RE1.1 T1.1 | length 31
  Top Layer w0.508: D1.2 83.055,51.959 RE1.1
  Bottom Layer w0.508: RE1.1 88.619,50.673 95.198,50.673 95.356,50.673 99.616,47.752 104.785,47.752 106.172,49.139 T1.1
NetD2_1: D2.1 IC3.11 R3.2 R6.1 | length 168.4
  Top Layer w0.508: v1(93.116,63.779) 93.218,63.881 R3.2 94.808,61.214 95.062,60.96 R6.1
  Bottom Layer w0.508: IC3.11 55.905,29.718 63.805,37.617 64.567,37.617 64.567,57.226 62.992,58.801 60.833,58.801 59.182,57.15 32.258,57.15 30.455,55.347 21.59,55.347 20.726,56.21 20.726,57.726 21.565,58.565 21.928,58.565 23.438,57.566 D2.1 23.862,57.358 26.067,59.563 40.578,59.563 40.705,59.436 58.293,59.436 60.579,61.722 62.992,61.722 65.151,59.563 81.026,59.563 85.471,64.008 92.888,64.008 v1(93.116,63.779)
NetIC2_1: IC2.1 R12.2 R14.1 | length 50.7
  Top Layer w0.508: IC2.1 71.933,41.656 73.101,40.488 73.222,40.488 ; R14.1 72.625,26.548 74.144,28.067 74.144,39.566 73.222,40.488 ; R12.2 81.666,40.386 81.564,40.488 73.222,40.488
NetIC2_2: IC2.2 R11.1 R15.1 | length 38
  Top Layer w0.508: IC2.2 71.858,38.029 71.858,33.275 70.46,31.877 70.46,25.527 71.41,24.577 72.848,24.577 73.61,23.815 R11.1 77.47,23.815 79.172,22.113 79.172,12.231 81.346,10.057 R15.1
NetIC2_6: IC2.6 R1.1 R8.1 | length 36.2
  Top Layer w0.508: v1(85.623,36.576) 88.062,34.138 88.062,19.34 87.315,18.593 R1.1 87.315,12.75 R8.1
  Bottom Layer w0.508: IC2.6 v1(85.623,36.576)
NetIC2_7: IC2.7 R1.2 R5.1 | length 36.5
  Top Layer w0.508: v1(89.215,36.693) R1.2 90.104,15.494 R5.1
  Bottom Layer w0.508: IC2.7 86.792,39.116 v1(89.215,36.693)
NetIC3_1: IC3.1 R19.2 | length 100.4
  Top Layer w0.508: R19.2 3.937,51.435 1.27,48.768 1.27,10.617 10.617,1.27 49.149,1.27 IC3.1
NetIC3_2: IC3.2 K7.2 R16.2 | length 18.2
  Top Layer w0.508: R16.2 55.172,3.241 54.164,4.249 54.164,5.606 53.42,6.35 52.885,6.35 52.377,6.858 IC3.2 52.326,6.987 52.708,6.987 52.833,7.112 54.737,7.112 K7.2
NetIC3_7: IC3.7 K5.2 | length 22
  Top Layer w0.508: IC3.7 56.134,23.495 K5.2
NetIC3_8: IC3.8 K5.1 | length 21.8
  Top Layer w0.508: IC3.8 54,23.901 54,39.836 55.754,42.038 K5.1
NetIC3_12: IC3.12 K9.5 | length 24.4
  Bottom Layer w0.508: K9.5 32.233,23.52 43.459,23.52 IC3.12
NetIC3_13: IC3.13 K9.4 | length 24.4
  Bottom Layer w0.508: K9.4 32.233,26.06 42.075,26.06 50.813,34.798 IC3.13
NetIC3_14: IC3.14 K9.3 | length 24.4
  Bottom Layer w0.508: K9.3 33.043,29.21 33.653,28.6 43.459,28.6 IC3.14
NetIC3_15: IC3.15 K9.2 | length 24.4
  Bottom Layer w0.508: K9.2 32.233,31.14 43.459,31.14 IC3.15
NetIC3_16: IC3.16 K9.1 | length 23.9
  Bottom Layer w0.508: K9.1 33.401,36.068 45.212,36.068 51.433,42.289 52.068,42.289 IC3.16
NetIC3_19: IC3.19 R7.2 | length 40.5
  Top Layer w0.508: R7.2 17.338,54.915 v1(18.964,53.289)
  Bottom Layer w0.508: v1(18.964,53.289) 31.902,53.289 33.934,55.321 46.914,55.321 IC3.19
NetIC3_20: IC3.20 K4.3 | length 52.6
  Top Layer w0.508: v1(50.241,47.015) 50.241,50.876 51.621,52.256 51.692,52.256 52.014,52.578 IC3.20
  Bottom Layer w0.508: K4.3 27.051,39.573 30.48,43.002 32.995,43.002 33.85,43.858 37.845,43.858 38.735,44.748 38.735,47.168 36.982,48.92 35.408,48.92 34.417,49.911 34.417,50.546 35.027,51.156 40.488,51.156 44.628,47.015 v1(50.241,47.015)
NetIC3_21: IC3.21 K4.2 | length 61.1
  Bottom Layer w0.508: K4.2 25.781,29.845 25.781,26.975 27.94,26.975 28.575,27.61 28.575,29.083 29.159,29.667 29.159,37.541 30.074,38.456 43.18,38.456 51.097,46.373 51.097,47.52 49.748,48.87 45.11,48.87 41.402,52.578 IC3.21
NetIC3_22: IC3.22 K4.1 | length 33
  Bottom Layer w0.508: K4.1 27.796,29.32 27.796,29.874 28.397,30.475 28.397,38.43 31.242,41.275 37.846,41.275 40.64,44.069 40.64,46.884 37.486,50.038 IC3.22
NetIC3_23: IC3.23 K6.2 | length 29.8
  Bottom Layer w0.508: K6.2 10.855,38.668 11.617,38.668 15.621,42.672 16.586,42.672 21.412,47.498 IC3.23
NetIC3_24: IC3.24 K6.3 | length 30.7
  Bottom Layer w0.508: K6.3 10.862,36.135 11.503,36.135 21.419,46.05 35.675,46.05 IC3.24
NetIC3_27: IC3.27 K11.1 | length 22.7
  Top Layer w0.508: K11.1 34.138,18.771 34.138,34.709 IC3.27
NetIC3_28: IC3.28 K11.4 | length 35.4
  Bottom Layer w0.508: K11.4 26.111,14.91 26.111,22.873 29.337,26.099 29.337,27.813 29.921,28.397 29.921,32.588 30.353,33.02 34.989,33.02 IC3.28
NetIC3_30: IC3.30 K11.5 | length 28.9
  Top Layer w0.508: K11.5 33.807,8.28 37.465,8.28 38.629,9.444 38.629,27.856 IC3.30
NetIC3_33: IC3.33 K10.1 | length 23.6
  Top Layer w0.508: v1(55.143,20.98) 56.515,19.609 K10.1
  Bottom Layer w0.508: IC3.33 37.885,20.98 v1(55.143,20.98)
NetIC3_34: IC3.34 K10.2 | length 22
  Bottom Layer w0.508: IC3.34 46.152,19.558 50.114,15.596 55.143,15.596 K10.2
NetIC3_35: IC3.35 Kd.3 R22.2 | length 230.3
  Top Layer w0.508: IC3.35 35.662,18.123 35.662,30.988 40.64,30.988 48.514,38.862 48.514,65.913 50.8,68.199 83.312,68.199 Kd.3 85.237,69.85 85.615,70.228 85.722,70.228 87.757,72.263 103.632,72.263 111.633,64.262 111.633,12.827 100.33,1.524 71.12,1.524 67.178,5.466 R22.2
NetIC3_36: IC3.36 Kd.2 R21.2 | length 134
  Top Layer w0.508: v1(58.801,5.08) 58.862,5.019 R21.2 57.897,2.083 54.61,2.083 53.402,3.291 53.402,5.29 53.104,5.588 51.841,5.588 50.8,6.629 50.8,40.513 51.562,41.275 52.055,41.275 53.44,41.375 54.077,42.012 54.077,55.728 65.532,67.183 84.732,67.183 Kd.2
  Bottom Layer w0.508: IC3.36 40.425,10.82 54.839,10.82 58.801,6.858 v1(58.801,5.08)
NetK2_2: K2.2 RE1.2 RE1.4 | length 64.5
  Top Layer w1.27: RE1.4 84.074,25.6 84.074,30.868 RE1.2
  Bottom Layer w1.27: RE1.4 86.694,23.194 91.567,28.067 91.567,30.117 92.311,30.861 94.488,30.861 97.79,34.163 102.616,34.163 105.41,36.957 105.41,41.867 109.047,45.203 109.231,45.386 109.326,45.599 109.373,45.703 109.495,47.523 109.601,54.521 109.601,56.835 K2.2
NetK3_2: K3.2 R2.1 R4.2 R9.1 R13.2 | length 46.4
  Top Layer w0.508: R9.1 76.637,10.734 77.338,10.033 77.338,6.034 77.338,5.918 R2.1 ; R2.1@77.338,5.788 78.027,6.477 81.835,6.477 82.132,6.179 82.132,4.923 R13.2 83.434,5.776 R4.2 v1(92.674,5.776)
  Bottom Layer w0.508: v1(92.674,5.776) 92.674,3.211 93.726,2.159 97.409,2.159 K3.2
NetK8_1: K8.1 L2.1 | length 12.3
  Top Layer w1.27: K8.1 12.065,13.843 L2.1
NetK8_2: K8.2 L2.4 | length 12.1
  Top Layer w1.27: L2.4 4.445,20.955 5.461,19.939 K8.2
NetL2_2: L2.2 T3.3 | length 15.6
  Top Layer w0.508: T3.3@3.048,35.56 T3.3@3.048,36.703
  Top Layer w1.27: T3.3 3.048,33.655 10.16,26.543 L2.2
NetR7_1: R7.1 R10.1 T1.2 | length 147.5
  Top Layer w0.508: R7.1 19.238,57.175 v1(21.488,57.175) ; R10.1 94.427,67.674 94.129,67.376 92.931,67.376 88.011,62.456 88.011,58.75 91.161,55.601 96.971,55.601 98.425,57.055 100.178,58.807 100.178,62.509 101.6,63.932 105.359,63.932 106.426,62.865 106.426,56.134 104.394,54.102 T1.2
  Bottom Layer w0.508: v1(21.488,57.175) 21.641,57.175 22.657,56.159 29.566,56.159 31.318,57.912 58.42,57.912 60.325,59.817 63.246,59.817 64.262,58.801 72.703,58.801 73.592,57.912 85.623,57.912 90.957,52.578 103.251,52.578 104.298,51.531 104.298,49.118 T1.2
NetR11_2: R11.2 R12.1 | length 17.5
  Top Layer w0.508: R11.2 77.495,25.715 80.162,23.048 80.162,15.875 80.797,15.24 82.677,15.24 83.566,16.129 R12.1
NetR17_2: R17.2 T2.2 T4.1 T5.2 | length 86
  Top Layer w0.508: T2.2@4.953,49.53 7.62,52.197 10.414,52.197 ; T4.1@8.585,63.221 6.909,61.544 6.909,55.245 10.414,52.197 ; R17.2 10.414,52.197 ; T5.2 19.827,30.084 19.827,37.425 17.757,39.494 15.116,39.494 12.321,42.289 9.92,42.289 9.017,41.386 9.017,35.56 9.906,34.671 12.783,34.671 13.081,34.373 13.081,31.032 12.783,30.734 9.144,30.734 7.112,32.766 7.112,45.695 9.652,48.235 9.652,51.435 10.414,52.197
NetR18_1: R18.1 T2.3 T5.3 | length 61.6
  Top Layer w0.508: R18.1 19.873,61.051 22.25,58.674 22.25,31.827 21.844,31.42 T5.3
  Bottom Layer w0.508: T2.3 6.68,37.516 9.527,34.669 13.083,34.669 14.605,33.147 19.364,33.147 T5.3
NetR18_2: R18.2 T3.1 | length 35.2
  Top Layer w0.508: v1(16.51,58.776) 17.973,60.239 R18.2
  Bottom Layer w0.508: T3.1@3.048,41.783 T3.1 2.342,42.87 1.961,42.87 1.651,43.18 1.651,55.601 4.826,58.776 v1(16.51,58.776)
NetR19_1: R19.1 R20.1 T4.2 | length 24.6
  Top Layer w0.508: R19.1 2.037,55.067 5.969,58.999 5.969,64.262 6.731,65.024 9.302,65.024 9.683,64.643 9.906,64.643 9.906,56.581 R20.1
VCC: B1.1 C1.1 R3.1 | length 80.1
  Top Layer w0.508: 99.144,66.317 99.36,66.317 ; 106.769,66.154 106.914,66.01
  Top Layer w1.27: C1.1 72.378,57.138 79.629,64.389 86.36,64.389 90.172,68.201 91.331,68.201 92.075,68.945 92.075,70.104 93.091,71.12 98.552,71.12 103.445,66.227 ; R3.1 99.144,66.317 ; 99.36,66.317 103.445,66.227 ; 106.769,66.154 103.445,66.227 ; 106.914,66.01 110.363,62.56 110.363,41.91 B1.1
VIN: R17.1 T2.1 T3.2 | length 24.3
  Top Layer w1.27: T3.2@3.048,39.243 3.051,39.24 3.632,39.24 3.635,39.243 4.59,39.243 5.334,39.987 5.334,45.974 T2.1 ; v1@10.013,54.097 R17.1
  Bottom Layer w1.27: T2.1 3.251,48.101 2.921,48.432 2.921,50.292 6.858,54.229 9.881,54.229 v1(9.946,54.164)
pads on no net: IC3.3 IC3.4 IC3.25 IC3.26 IC3.40 RE1.7 S1.MP1 S1.MP2 T5.1

## Polygon pours and split planes (outlines as drawn)
GND on Top Layer "GND_L01_P000" (solid, pour order 0): 5.207,66.929 3.302,65.024 3.302,7.112 8.255,2.159 101.219,2.159 110.236,11.176 109.347,12.065 109.347,65.659 108.204,65.659 102.362,71.501 101.854,70.993 33.655,70.993 33.528,71.12 8.763,71.12
GND on Bottom Layer "GND_L02_P001" (solid, pour order 1): 2.413,61.595 2.413,62.611 11.811,72.009 12.065,71.755 103.378,71.755 103.378,71.501 110.744,64.135 110.744,6.985 109.601,6.985 104.267,1.651 8.89,1.651 1.905,8.636 2.159,8.89 2.159,62.23

## Silkscreen, mask and mechanical layers (free items; w line width, h text height)
Top Overlay:
  text "Boghe Tim 1EAI" at 54.356,70.485 h1.52

## Text inside footprints (layer, text, board x,y; h text height)
K6: Top Overlay "4" at 12.7,32.385 h1.02; Top Overlay "1" at 12.7,40.894 h1.02
K9: Top Overlay "1" at 34.036,34.798 h1.02 r180; Top Overlay "5" at 34.417,24.511 h1.02 r180
K11: Top Overlay "6" at 34.036,3.556 h1.02; Top Overlay "1" at 34.163,16.383 h1.02
Kd: Bottom Overlay "1" at 90.297,71.755 h1.02; Bottom Overlay "4" at 81.534,66.929 h1.02